# EAGLE board Qwiic-Mux-Panel (EAGLE 7.7.0), part 1 of 2
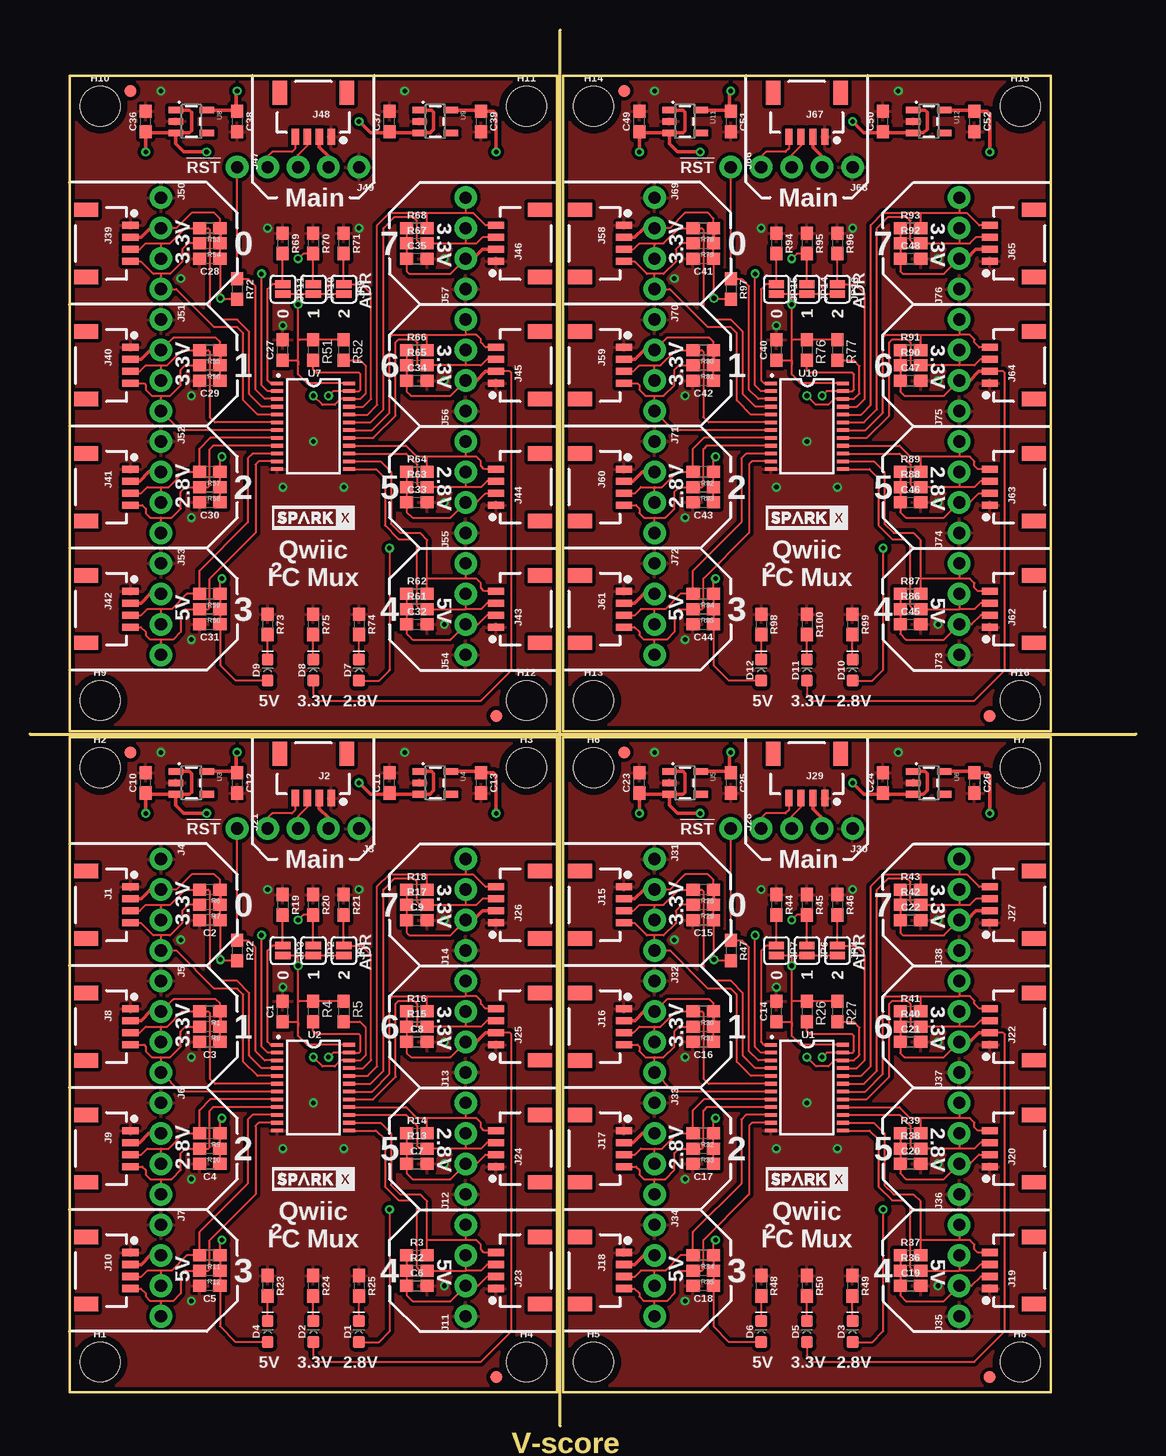
[diagram p0: board, top side]
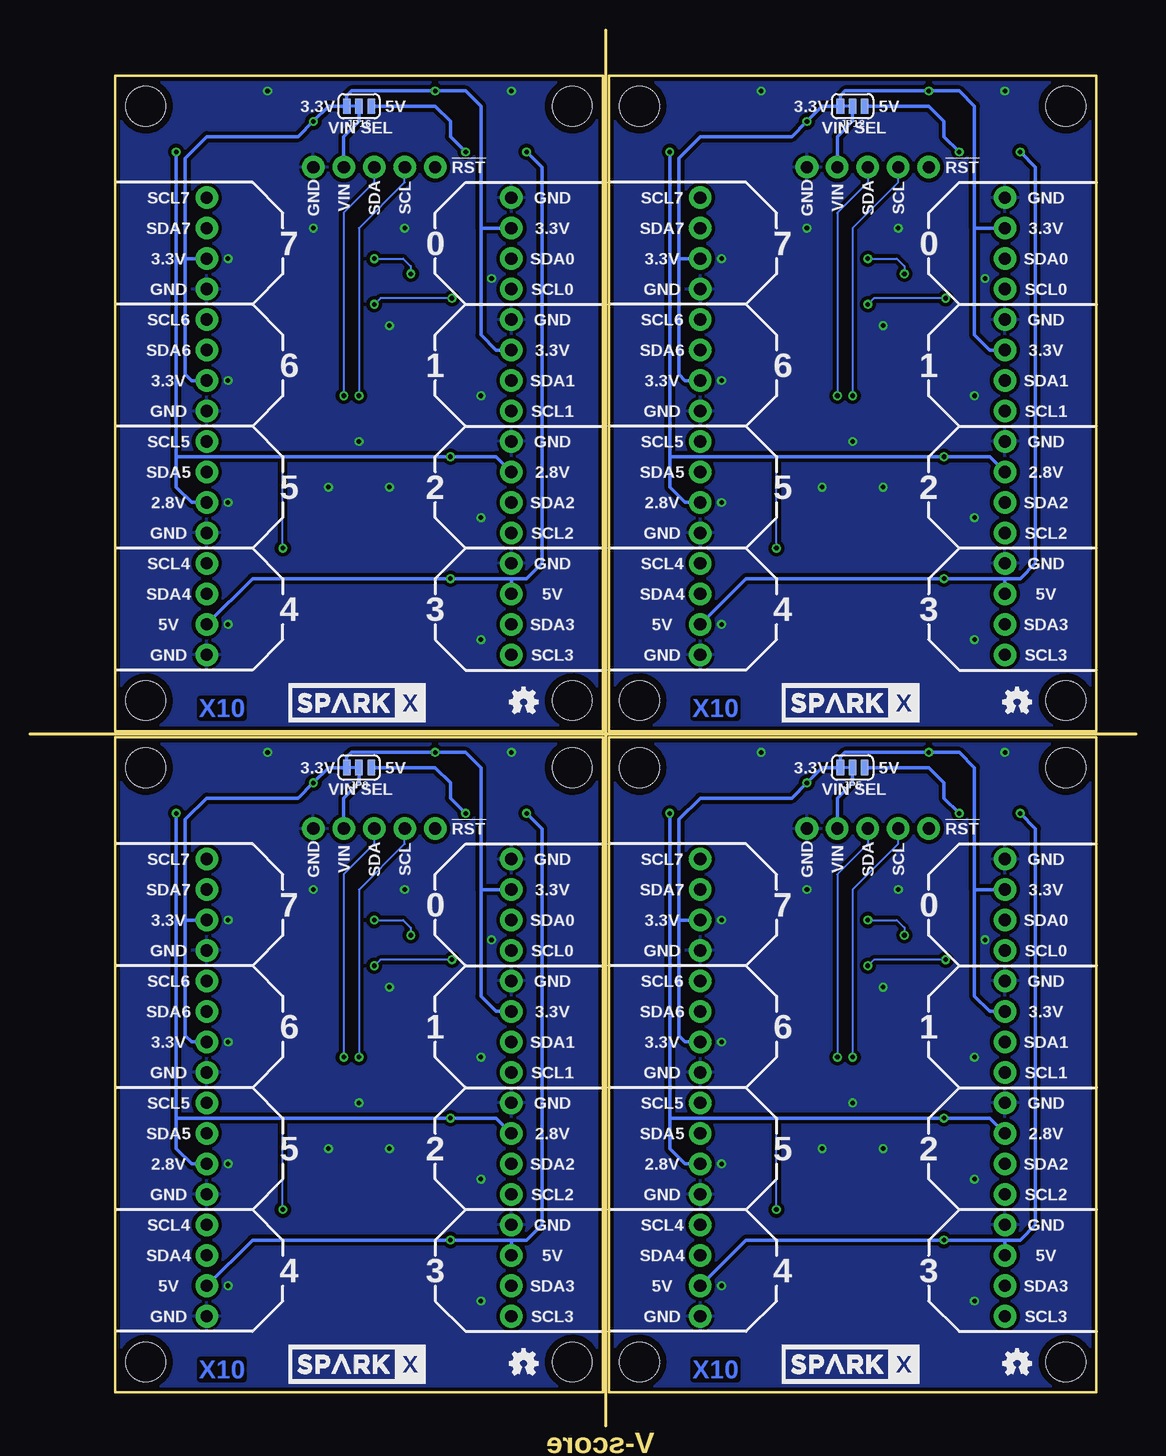
[diagram p1: board, bottom side, seen from below]

Size 92.2 x 116.33 mm. Coordinates in mm from the lower left corner, seen from the top.
Outline: 44.2,0 44.2,116.33
Outline: 0,57.66 92.2,57.66
Outline: 3.3,57.4 3.3,2.79 43.94,2.79 43.94,57.4 3.3,57.4
Outline: 44.45,57.4 44.45,2.79 85.09,2.79 85.09,57.4 44.45,57.4
Outline: 3.3,112.52 3.3,57.91 43.94,57.91 43.94,112.52 3.3,112.52
Outline: 44.45,112.52 44.45,57.91 85.09,57.91 85.09,112.52 44.45,112.52
Copper layers (1*16): Top 0.035mm / dielectric 1.5mm / Bottom 0.035mm
Design rules "SparkFun-2-layer-TIGHT": minimum track width 7mil, minimum drill 15mil, track to track 7mil, track to pad 7mil, pad to pad 7mil, via to via 7mil, smd to smd 7mil, copper to edge 7mil, drill to drill 7mil, minimum pad ring 7mil, minimum via ring 7mil, stop-mask expansion 4mil, vias tented up to drill 25mil, thermal gap 10mil
Net classes: 0 Default: width 0.178 mm; 1 vcc: width 0.178 mm

## Footprints (pad centres in the part's own frame; a part is rotated, then mirrored left to right if it is on the bottom)
0603 = smd 1.1 x 1: 1 -0.85,0; 2 0.85,0
LED-0603 = smd 1 x 1: A -0.877,0; C 0.877,0
FIDUCIAL-1X2 = smd 1 x 1: 1 0,0
STAND-OFF = hole 3.302: 0,0
1X04_1MM_RA = smd 0.6 x 1.35: 1 -1.5,0; 2 -0.5,0; 3 0.5,0; 4 1.5,0 | smd 1.2 x 2: NC1 2.8,-3.675; NC2 -2.8,-3.675
1X04_NO_SILK = drill 1.016 pad 1.88: 1 0,0; 2 2.54,0; 3 5.08,0; 4 7.62,0
1X01_NO_SILK = drill 1.016 pad 1.88: 1 0,0
SMT-JUMPER_2_NO_SILK = smd 0.635 x 1.27: 1 -0.406,0; 2 0.406,0
SMT-JUMPER_3_1-NC_TRACE_SILK = smd 0.635 x 1.27: 1 -1.016,0; 2 0,0; 3 1.016,0
TSSOP28 = smd 1 x 0.3: 1 -3,3.57; 2 -3,2.925; 3 -3,2.275; 4 -3,1.625; 5 -3,0.975; 6 -3,0.325; 7 -3,-0.325; 8 -3,-0.975; 9 -3,-1.625; 10 -3,-2.275; 11 -3,-2.925; 12 -3,-3.575; 13 3,-3.575; 14 3,-2.925; 15 3,-2.275; 16 3,-1.625; 17 3,-0.975; 18 3,-0.325; 19 3,0.325; 20 3,0.975; 21 3,1.625; 22 3,2.275; 23 3,2.925; 24 3,3.575
SOT23-5 = smd 0.55 x 1.2: 1 -0.95,-1.3; 2 0,-1.3; 3 0.95,-1.3; 4 0.95,1.3; 5 -0.95,1.3

## Placement (x,y rotation side)
C1  0.1uF  [0603]  21.08,34.54 90 top
C2  1.0uF  [0603]  14.99,42.16 180 top
C3  1.0uF  [0603]  14.99,32 180 top
C4  1.0uF  [0603]  14.99,21.84 180 top
C5  1.0uF  [0603]  14.99,11.68 180 top
C6  1.0uF  [0603]  32.26,11.68 0 top
C7  1.0uF  [0603]  32.26,21.84 0 top
C8  1.0uF  [0603]  32.26,32 0 top
C9  1.0uF  [0603]  32.26,42.16 0 top
C10  10uF  [0603]  9.65,53.59 90 top
C11  10uF  [0603]  29.97,53.59 90 top
C12  1.0uF  [0603]  17.27,53.59 270 top
C13  10uF  [0603]  37.59,53.59 270 top
C14  0.1uF  [0603]  62.23,34.54 90 top
C15  1.0uF  [0603]  56.13,42.16 180 top
C16  1.0uF  [0603]  56.13,32 180 top
C17  1.0uF  [0603]  56.13,21.84 180 top
C18  1.0uF  [0603]  56.13,11.68 180 top
C19  1.0uF  [0603]  73.41,11.68 0 top
C20  1.0uF  [0603]  73.41,21.84 0 top
C21  1.0uF  [0603]  73.41,32 0 top
C22  1.0uF  [0603]  73.41,42.16 0 top
C23  10uF  [0603]  50.8,53.59 90 top
C24  10uF  [0603]  71.12,53.59 90 top
C25  1.0uF  [0603]  58.42,53.59 270 top
C26  10uF  [0603]  78.74,53.59 270 top
C27  0.1uF  [0603]  21.08,89.66 90 top
C28  1.0uF  [0603]  14.99,97.28 180 top
C29  1.0uF  [0603]  14.99,87.12 180 top
C30  1.0uF  [0603]  14.99,76.96 180 top
C31  1.0uF  [0603]  14.99,66.8 180 top
C32  1.0uF  [0603]  32.26,66.8 0 top
C33  1.0uF  [0603]  32.26,76.96 0 top
C34  1.0uF  [0603]  32.26,87.12 0 top
C35  1.0uF  [0603]  32.26,97.28 0 top
C36  10uF  [0603]  9.65,108.71 90 top
C37  10uF  [0603]  29.97,108.71 90 top
C38  1.0uF  [0603]  17.27,108.71 270 top
C39  10uF  [0603]  37.59,108.71 270 top
C40  0.1uF  [0603]  62.23,89.66 90 top
C41  1.0uF  [0603]  56.13,97.28 180 top
C42  1.0uF  [0603]  56.13,87.12 180 top
C43  1.0uF  [0603]  56.13,76.96 180 top
C44  1.0uF  [0603]  56.13,66.8 180 top
C45  1.0uF  [0603]  73.41,66.8 0 top
C46  1.0uF  [0603]  73.41,76.96 0 top
C47  1.0uF  [0603]  73.41,87.12 0 top
C48  1.0uF  [0603]  73.41,97.28 0 top
C49  10uF  [0603]  50.8,108.71 90 top
C50  10uF  [0603]  71.12,108.71 90 top
C51  1.0uF  [0603]  58.42,108.71 270 top
C52  10uF  [0603]  78.74,108.71 270 top
D1  GREEN  [LED-0603]  27.43,7.87 90 top
D2  Yellow  [LED-0603]  23.62,7.87 90 top
D3  GREEN  [LED-0603]  68.58,7.87 90 top
D4  BLUE  [LED-0603]  19.81,7.87 90 top
D5  Yellow  [LED-0603]  64.77,7.87 90 top
D6  BLUE  [LED-0603]  60.96,7.87 90 top
D7  GREEN  [LED-0603]  27.43,62.99 90 top
D8  Yellow  [LED-0603]  23.62,62.99 90 top
D9  BLUE  [LED-0603]  19.81,62.99 90 top
D10  GREEN  [LED-0603]  68.58,62.99 90 top
D11  Yellow  [LED-0603]  64.77,62.99 90 top
D12  BLUE  [LED-0603]  60.96,62.99 90 top
FD1  FIDUCIAL1X2  [FIDUCIAL-1X2]  8.38,56.13 180 top
FD2  FIDUCIAL1X2  [FIDUCIAL-1X2]  38.86,4.06 180 top
FD3  FIDUCIAL1X2  [FIDUCIAL-1X2]  49.53,56.13 180 top
FD4  FIDUCIAL1X2  [FIDUCIAL-1X2]  80.01,4.06 180 top
FD5  FIDUCIAL1X2  [FIDUCIAL-1X2]  8.38,111.25 180 top
FD6  FIDUCIAL1X2  [FIDUCIAL-1X2]  38.86,59.18 180 top
FD7  FIDUCIAL1X2  [FIDUCIAL-1X2]  49.53,111.25 180 top
FD8  FIDUCIAL1X2  [FIDUCIAL-1X2]  80.01,59.18 180 top
H1  STAND-OFF  [STAND-OFF]  5.84,5.33 0 top
H2  STAND-OFF  [STAND-OFF]  5.84,54.86 0 top
H3  STAND-OFF  [STAND-OFF]  41.4,54.86 0 top
H4  STAND-OFF  [STAND-OFF]  41.4,5.33 0 top
H5  STAND-OFF  [STAND-OFF]  46.99,5.33 0 top
H6  STAND-OFF  [STAND-OFF]  46.99,54.86 0 top
H7  STAND-OFF  [STAND-OFF]  82.55,54.86 0 top
H8  STAND-OFF  [STAND-OFF]  82.55,5.33 0 top
H9  STAND-OFF  [STAND-OFF]  5.84,60.45 0 top
H10  STAND-OFF  [STAND-OFF]  5.84,109.98 0 top
H11  STAND-OFF  [STAND-OFF]  41.4,109.98 0 top
H12  STAND-OFF  [STAND-OFF]  41.4,60.45 0 top
H13  STAND-OFF  [STAND-OFF]  46.99,60.45 0 top
H14  STAND-OFF  [STAND-OFF]  46.99,109.98 0 top
H15  STAND-OFF  [STAND-OFF]  82.55,109.98 0 top
H16  STAND-OFF  [STAND-OFF]  82.55,60.45 0 top
J1  SMD  [1X04_1MM_RA]  8.38,43.43 270 top
J2  SMD  [1X04_1MM_RA]  23.62,52.32 180 top
J3  PTH  [1X04_NO_SILK]  27.43,49.78 180 top
J4  PTH  [1X04_NO_SILK]  10.92,47.24 270 top
J5  PTH  [1X04_NO_SILK]  10.92,37.08 270 top
J6  PTH  [1X04_NO_SILK]  10.92,26.92 270 top
J7  PTH  [1X04_NO_SILK]  10.92,16.76 270 top
J8  SMD  [1X04_1MM_RA]  8.38,33.27 270 top
J9  SMD  [1X04_1MM_RA]  8.38,23.11 270 top
J10  SMD  [1X04_1MM_RA]  8.38,12.95 270 top
J11  PTH  [1X04_NO_SILK]  36.32,9.14 90 top
J12  PTH  [1X04_NO_SILK]  36.32,19.3 90 top
J13  PTH  [1X04_NO_SILK]  36.32,29.46 90 top
J14  PTH  [1X04_NO_SILK]  36.32,39.62 90 top
J15  SMD  [1X04_1MM_RA]  49.53,43.43 270 top
J16  SMD  [1X04_1MM_RA]  49.53,33.27 270 top
J17  SMD  [1X04_1MM_RA]  49.53,23.11 270 top
J18  SMD  [1X04_1MM_RA]  49.53,12.95 270 top
J19  SMD  [1X04_1MM_RA]  80.01,12.95 90 top
J20  SMD  [1X04_1MM_RA]  80.01,23.11 90 top
J21  [1X01_NO_SILK]  17.27,49.78 270 top
J22  SMD  [1X04_1MM_RA]  80.01,33.27 90 top
J23  SMD  [1X04_1MM_RA]  38.86,12.95 90 top
J24  SMD  [1X04_1MM_RA]  38.86,23.11 90 top
J25  SMD  [1X04_1MM_RA]  38.86,33.27 90 top
J26  SMD  [1X04_1MM_RA]  38.86,43.43 90 top
J27  SMD  [1X04_1MM_RA]  80.01,43.43 90 top
J28  [1X01_NO_SILK]  58.42,49.78 270 top
J29  SMD  [1X04_1MM_RA]  64.77,52.32 180 top
J30  PTH  [1X04_NO_SILK]  68.58,49.78 180 top
J31  PTH  [1X04_NO_SILK]  52.07,47.24 270 top
J32  PTH  [1X04_NO_SILK]  52.07,37.08 270 top
J33  PTH  [1X04_NO_SILK]  52.07,26.92 270 top
J34  PTH  [1X04_NO_SILK]  52.07,16.76 270 top
J35  PTH  [1X04_NO_SILK]  77.47,9.14 90 top
J36  PTH  [1X04_NO_SILK]  77.47,19.3 90 top
J37  PTH  [1X04_NO_SILK]  77.47,29.46 90 top
J38  PTH  [1X04_NO_SILK]  77.47,39.62 90 top
J39  SMD  [1X04_1MM_RA]  8.38,98.55 270 top
J40  SMD  [1X04_1MM_RA]  8.38,88.39 270 top
J41  SMD  [1X04_1MM_RA]  8.38,78.23 270 top
J42  SMD  [1X04_1MM_RA]  8.38,68.07 270 top
J43  SMD  [1X04_1MM_RA]  38.86,68.07 90 top
J44  SMD  [1X04_1MM_RA]  38.86,78.23 90 top
J45  SMD  [1X04_1MM_RA]  38.86,88.39 90 top
J46  SMD  [1X04_1MM_RA]  38.86,98.55 90 top
J47  [1X01_NO_SILK]  17.27,104.9 270 top
J48  SMD  [1X04_1MM_RA]  23.62,107.44 180 top
J49  PTH  [1X04_NO_SILK]  27.43,104.9 180 top
J50  PTH  [1X04_NO_SILK]  10.92,102.36 270 top
J51  PTH  [1X04_NO_SILK]  10.92,92.2 270 top
J52  PTH  [1X04_NO_SILK]  10.92,82.04 270 top
J53  PTH  [1X04_NO_SILK]  10.92,71.88 270 top
J54  PTH  [1X04_NO_SILK]  36.32,64.26 90 top
J55  PTH  [1X04_NO_SILK]  36.32,74.42 90 top
J56  PTH  [1X04_NO_SILK]  36.32,84.58 90 top
J57  PTH  [1X04_NO_SILK]  36.32,94.74 90 top
J58  SMD  [1X04_1MM_RA]  49.53,98.55 270 top
J59  SMD  [1X04_1MM_RA]  49.53,88.39 270 top
J60  SMD  [1X04_1MM_RA]  49.53,78.23 270 top
J61  SMD  [1X04_1MM_RA]  49.53,68.07 270 top
J62  SMD  [1X04_1MM_RA]  80.01,68.07 90 top
J63  SMD  [1X04_1MM_RA]  80.01,78.23 90 top
J64  SMD  [1X04_1MM_RA]  80.01,88.39 90 top
J65  SMD  [1X04_1MM_RA]  80.01,98.55 90 top
J66  [1X01_NO_SILK]  58.42,104.9 270 top
J67  SMD  [1X04_1MM_RA]  64.77,107.44 180 top
J68  PTH  [1X04_NO_SILK]  68.58,104.9 180 top
J69  PTH  [1X04_NO_SILK]  52.07,102.36 270 top
J70  PTH  [1X04_NO_SILK]  52.07,92.2 270 top
J71  PTH  [1X04_NO_SILK]  52.07,82.04 270 top
J72  PTH  [1X04_NO_SILK]  52.07,71.88 270 top
J73  PTH  [1X04_NO_SILK]  77.47,64.26 90 top
J74  PTH  [1X04_NO_SILK]  77.47,74.42 90 top
J75  PTH  [1X04_NO_SILK]  77.47,84.58 90 top
J76  PTH  [1X04_NO_SILK]  77.47,94.74 90 top
JP1  [SMT-JUMPER_2_NO_SILK]  26.16,39.62 270 top
JP2  [SMT-JUMPER_2_NO_SILK]  23.62,39.62 270 top
JP3  [SMT-JUMPER_2_NO_SILK]  21.08,39.62 270 top
JP4  [SMT-JUMPER_2_NO_SILK]  67.31,39.62 270 top
JP5  [SMT-JUMPER_3_1-NC_TRACE_SILK]  23.62,54.86 180 bottom
JP6  [SMT-JUMPER_2_NO_SILK]  64.77,39.62 270 top
JP7  [SMT-JUMPER_2_NO_SILK]  62.23,39.62 270 top
JP8  [SMT-JUMPER_3_1-NC_TRACE_SILK]  64.77,54.86 180 bottom
JP9  [SMT-JUMPER_2_NO_SILK]  26.16,94.74 270 top
JP10  [SMT-JUMPER_2_NO_SILK]  23.62,94.74 270 top
JP11  [SMT-JUMPER_2_NO_SILK]  21.08,94.74 270 top
JP12  [SMT-JUMPER_3_1-NC_TRACE_SILK]  23.62,109.98 180 bottom
JP13  [SMT-JUMPER_2_NO_SILK]  67.31,94.74 270 top
JP14  [SMT-JUMPER_2_NO_SILK]  64.77,94.74 270 top
JP15  [SMT-JUMPER_2_NO_SILK]  62.23,94.74 270 top
JP16  [SMT-JUMPER_3_1-NC_TRACE_SILK]  64.77,109.98 180 bottom
LOGO1  OSHW-LOGOMINI  [OSHW-LOGO-MINI]  9.9,5.22 0 bottom
LOGO2  OSHW-LOGOMINI  [OSHW-LOGO-MINI]  51.05,5.22 0 bottom
LOGO3  OSHW-LOGOMINI  [OSHW-LOGO-MINI]  9.9,60.34 0 bottom
LOGO4  OSHW-LOGOMINI  [OSHW-LOGO-MINI]  51.05,60.34 0 bottom
R1  4.7k  [0603]  14.99,34.54 180 top
R2  4.7k  [0603]  32.26,12.95 0 top
R3  4.7k  [0603]  32.26,14.22 0 top
R4  4.7k  [0603]  23.62,34.54 270 top
R5  4.7k  [0603]  26.16,34.54 270 top
R6  4.7k  [0603]  14.99,44.7 180 top
R7  4.7k  [0603]  14.99,43.43 180 top
R8  4.7k  [0603]  14.99,33.27 180 top
R9  4.7k  [0603]  14.99,24.38 180 top
R10  4.7k  [0603]  14.99,23.11 180 top
R11  4.7k  [0603]  14.99,14.22 180 top
R12  4.7k  [0603]  14.99,12.95 180 top
R13  4.7k  [0603]  32.26,23.11 0 top
R14  4.7k  [0603]  32.26,24.38 0 top
R15  4.7k  [0603]  32.26,33.27 0 top
R16  4.7k  [0603]  32.26,34.54 0 top
R17  4.7k  [0603]  32.26,43.43 0 top
R18  4.7k  [0603]  32.26,44.7 0 top
R19  10k  [0603]  21.08,43.43 270 top
R20  10k  [0603]  23.62,43.43 270 top
R21  10k  [0603]  26.16,43.43 270 top
R22  10k  [0603]  17.27,39.62 270 top
R23  330  [0603]  19.81,11.68 270 top
R24  330  [0603]  23.62,11.68 270 top
R25  330  [0603]  27.43,11.68 270 top
R26  4.7k  [0603]  64.77,34.54 270 top
R27  4.7k  [0603]  67.31,34.54 270 top
R28  4.7k  [0603]  56.13,44.7 180 top
R29  4.7k  [0603]  56.13,43.43 180 top
R30  4.7k  [0603]  56.13,34.54 180 top
R31  4.7k  [0603]  56.13,33.27 180 top
R32  4.7k  [0603]  56.13,24.38 180 top
R33  4.7k  [0603]  56.13,23.11 180 top
R34  4.7k  [0603]  56.13,14.22 180 top
R35  4.7k  [0603]  56.13,12.95 180 top
R36  4.7k  [0603]  73.41,12.95 0 top
R37  4.7k  [0603]  73.41,14.22 0 top
R38  4.7k  [0603]  73.41,23.11 0 top
R39  4.7k  [0603]  73.41,24.38 0 top
R40  4.7k  [0603]  73.41,33.27 0 top
R41  4.7k  [0603]  73.41,34.54 0 top
R42  4.7k  [0603]  73.41,43.43 0 top
R43  4.7k  [0603]  73.41,44.7 0 top
R44  10k  [0603]  62.23,43.43 270 top
R45  10k  [0603]  64.77,43.43 270 top
R46  10k  [0603]  67.31,43.43 270 top
R47  10k  [0603]  58.42,39.62 270 top
R48  330  [0603]  60.96,11.68 270 top
R49  330  [0603]  68.58,11.68 270 top
R50  330  [0603]  64.77,11.68 270 top
R51  4.7k  [0603]  23.62,89.66 270 top
R52  4.7k  [0603]  26.16,89.66 270 top
R53  4.7k  [0603]  14.99,99.82 180 top
R54  4.7k  [0603]  14.99,98.55 180 top
R55  4.7k  [0603]  14.99,89.66 180 top
R56  4.7k  [0603]  14.99,88.39 180 top
R57  4.7k  [0603]  14.99,79.5 180 top
R58  4.7k  [0603]  14.99,78.23 180 top
R59  4.7k  [0603]  14.99,69.34 180 top
R60  4.7k  [0603]  14.99,68.07 180 top
R61  4.7k  [0603]  32.26,68.07 0 top
R62  4.7k  [0603]  32.26,69.34 0 top
R63  4.7k  [0603]  32.26,78.23 0 top
R64  4.7k  [0603]  32.26,79.5 0 top
R65  4.7k  [0603]  32.26,88.39 0 top
R66  4.7k  [0603]  32.26,89.66 0 top
R67  4.7k  [0603]  32.26,98.55 0 top
R68  4.7k  [0603]  32.26,99.82 0 top
R69  10k  [0603]  21.08,98.55 270 top
R70  10k  [0603]  23.62,98.55 270 top
R71  10k  [0603]  26.16,98.55 270 top
R72  10k  [0603]  17.27,94.74 270 top
R73  330  [0603]  19.81,66.8 270 top
R74  330  [0603]  27.43,66.8 270 top
R75  330  [0603]  23.62,66.8 270 top
R76  4.7k  [0603]  64.77,89.66 270 top
R77  4.7k  [0603]  67.31,89.66 270 top
R78  4.7k  [0603]  56.13,99.82 180 top
R79  4.7k  [0603]  56.13,98.55 180 top
R80  4.7k  [0603]  56.13,89.66 180 top
R81  4.7k  [0603]  56.13,88.39 180 top
R82  4.7k  [0603]  56.13,79.5 180 top
R83  4.7k  [0603]  56.13,78.23 180 top
R84  4.7k  [0603]  56.13,69.34 180 top
R85  4.7k  [0603]  56.13,68.07 180 top
R86  4.7k  [0603]  73.41,68.07 0 top
R87  4.7k  [0603]  73.41,69.34 0 top
R88  4.7k  [0603]  73.41,78.23 0 top
R89  4.7k  [0603]  73.41,79.5 0 top
R90  4.7k  [0603]  73.41,88.39 0 top
R91  4.7k  [0603]  73.41,89.66 0 top
R92  4.7k  [0603]  73.41,98.55 0 top
R93  4.7k  [0603]  73.41,99.82 0 top
R94  10k  [0603]  62.23,98.55 270 top
R95  10k  [0603]  64.77,98.55 270 top
R96  10k  [0603]  67.31,98.55 270 top
R97  10k  [0603]  58.42,94.74 270 top
R98  330  [0603]  60.96,66.8 270 top
R99  330  [0603]  68.58,66.8 270 top
R100  330  [0603]  64.77,66.8 270 top
U1  TCA9548A  [TSSOP28]  64.77,28.19 0 top
U2  TCA9548A  [TSSOP28]  23.62,28.19 0 top
U3  3.3V/150mA  [SOT23-5]  13.46,53.59 270 top
U4  2.8V/150mA  [SOT23-5]  33.78,53.59 270 top
U5  3.3V/150mA  [SOT23-5]  54.61,53.59 270 top
U6  2.8V/150mA  [SOT23-5]  74.93,53.59 270 top
U7  TCA9548A  [TSSOP28]  23.62,83.31 0 top
U8  3.3V/150mA  [SOT23-5]  13.46,108.71 270 top
U9  2.8V/150mA  [SOT23-5]  33.78,108.71 270 top
U10  TCA9548A  [TSSOP28]  64.77,83.31 0 top
U11  3.3V/150mA  [SOT23-5]  54.61,108.71 270 top
U12  2.8V/150mA  [SOT23-5]  74.93,108.71 270 top
U$1  SPARKX-LOGO3  [SPARKX-SMALL]  23.62,20.57 0 top
U$2  SPARKX-LOGO5  [SPARKX-LARGE]  23.79,5.14 0 bottom
U$3  SPARKX-LOGO3  [SPARKX-SMALL]  64.77,20.57 0 top
U$4  SPARKX-LOGO5  [SPARKX-LARGE]  64.94,5.14 0 bottom
U$5  SPARKX-LOGO3  [SPARKX-SMALL]  23.62,75.69 0 top
U$6  SPARKX-LOGO5  [SPARKX-LARGE]  23.79,60.26 0 bottom
U$7  SPARKX-LOGO3  [SPARKX-SMALL]  64.77,75.69 0 top
U$8  SPARKX-LOGO5  [SPARKX-LARGE]  64.94,60.26 0 bottom

## Library data of the parts
C1 C14 C27 C40 = SparkFun-Capacitors; PROD_ID: CAP-00810
C2-C9 C12 C15-C22 C25 C28-C35 C38 C41-C48 C51 = SparkFun-Capacitors; PROD_ID: CAP-00868
C10 C11 C13 C23 C24 C26 C36 C37 C39 C49 C50 C52 = SparkFun-Capacitors; PROD_ID: CAP-11015
D1 D3 D7 D10 = SparkFun-LED; PROD_ID: DIO-00821
D2 D5 D8 D11 = SparkFun-LED; PROD_ID: DIO-09003
D4 D6 D9 D12 = SparkFun-LED; PROD_ID: DIO-08575
FD1-FD8 LOGO1-LOGO4 = SparkFun-Aesthetics
H1-H16 = SparkFun-Hardware
J1-J20 J22-J27 J29-J46 J48-J65 J67-J76 U1 U2 U7 U10 U$1-U$8 = SparkX
J21 J28 J47 J66 = SparkFun-Connectors
JP1-JP16 = SparkFun-Jumpers
R1-R18 R26-R43 R51-R68 R76-R93 = SparkFun-Resistors; PROD_ID: RES-07857
R19-R22 R44-R47 R69-R72 R94-R97 = SparkFun-Resistors; PROD_ID: RES-00824
R23-R25 R48-R50 R73-R75 R98-R100 = SparkFun-Resistors; PROD_ID: RES-00818
U3-U6 U8 U9 U11 U12 = SparkFun-IC-Power; PROD_ID: VREG-00822

## Nets
2.8V: C4.1 C7.1 C13.1 D1.A J6.2 J9.2 J12.2 J24.2 R9.1 R10.1 R13.1 R14.1 U4.5
2.8V1: C17.1 C20.1 C26.1 D3.A J17.2 J20.2 J33.2 J36.2 R32.1 R33.1 R38.1 R39.1 U6.5
2.8V2: C30.1 C33.1 C39.1 D7.A J41.2 J44.2 J52.2 J55.2 R57.1 R58.1 R63.1 R64.1 U9.5
2.8V3: C43.1 C46.1 C52.1 D10.A J60.2 J63.2 J71.2 J74.2 R82.1 R83.1 R88.1 R89.1 U12.5
3.3V: C1.1 C2.1 C3.1 C8.1 C9.1 C11.1 C12.1 D2.A J1.2 J4.2 J5.2 J8.2 J13.2 J14.2 J25.2 J26.2 JP1.2 JP2.2 JP3.2 JP5.3 R1.1 R4.1 R5.1 R6.1 R7.1 R8.1 R15.1 R16.1 R17.1 R18.1 R22.2 U2.24 U3.5 U4.1 U4.3
3.3V1: C14.1 C15.1 C16.1 C21.1 C22.1 C24.1 C25.1 D5.A J15.2 J16.2 J22.2 J27.2 J31.2 J32.2 J37.2 J38.2 JP4.2 JP6.2 JP7.2 JP8.3 R26.1 R27.1 R28.1 R29.1 R30.1 R31.1 R40.1 R41.1 R42.1 R43.1 R47.2 U1.24 U5.5 U6.1 U6.3
3.3V2: C27.1 C28.1 C29.1 C34.1 C35.1 C37.1 C38.1 D8.A J39.2 J40.2 J45.2 J46.2 J50.2 J51.2 J56.2 J57.2 JP9.2 JP10.2 JP11.2 JP12.3 R51.1 R52.1 R53.1 R54.1 R55.1 R56.1 R65.1 R66.1 R67.1 R68.1 R72.2 U7.24 U8.5 U9.1 U9.3
3.3V3: C40.1 C41.1 C42.1 C47.1 C48.1 C50.1 C51.1 D11.A J58.2 J59.2 J64.2 J65.2 J69.2 J70.2 J75.2 J76.2 JP13.2 JP14.2 JP15.2 JP16.3 R76.1 R77.1 R78.1 R79.1 R80.1 R81.1 R90.1 R91.1 R92.1 R93.1 R97.2 U10.24 U11.5 U12.1 U12.3
5V: C5.1 C6.1 C10.1 D4.A J7.2 J10.2 J11.2 J23.2 JP5.1 R2.1 R3.1 R11.1 R12.1 U3.1 U3.3
5V1: C18.1 C19.1 C23.1 D6.A J18.2 J19.2 J34.2 J35.2 JP8.1 R34.1 R35.1 R36.1 R37.1 U5.1 U5.3
5V2: C31.1 C32.1 C36.1 D9.A J42.2 J43.2 J53.2 J54.2 JP12.1 R59.1 R60.1 R61.1 R62.1 U8.1 U8.3
5V3: C44.1 C45.1 C49.1 D12.A J61.2 J62.2 J72.2 J73.2 JP16.1 R84.1 R85.1 R86.1 R87.1 U11.1 U11.3
!RST: J21.1 R22.1 U2.3
!RST1: J28.1 R47.1 U1.3
!RST2: J47.1 R72.1 U7.3
!RST3: J66.1 R97.1 U10.3
ADR0: JP3.1 R19.2 U2.1
ADR1: JP2.1 R20.2 U2.2
ADR2: JP1.1 R21.2 U2.21
ADR3: JP6.1 R45.2 U1.2
ADR4: JP7.1 R44.2 U1.1
ADR5: JP4.1 R46.2 U1.21
ADR6: JP10.1 R70.2 U7.2
ADR7: JP11.1 R69.2 U7.1
ADR8: JP9.1 R71.2 U7.21
ADR9: JP14.1 R95.2 U10.2
ADR10: JP15.1 R94.2 U10.1
ADR11: JP13.1 R96.2 U10.21
GND [vcc]: C1.2 C2.2 C3.2 C4.2 C5.2 C6.2 C7.2 C8.2 C9.2 C10.2 C11.2 C12.2 C13.2 J1.1 J2.1 J3.1 J4.1 J5.1 J6.1 J7.1 J8.1 J9.1 J10.1 J11.1 J12.1 J13.1 J14.1 J23.1 J24.1 J25.1 J26.1 R19.1 R20.1 R21.1 R23.1 R24.1 R25.1 U2.12 U3.2 U4.2
GND1 [vcc]: C14.2 C15.2 C16.2 C17.2 C18.2 C19.2 C20.2 C21.2 C22.2 C23.2 C24.2 C25.2 C26.2 J15.1 J16.1 J17.1 J18.1 J19.1 J20.1 J22.1 J27.1 J29.1 J30.1 J31.1 J32.1 J33.1 J34.1 J35.1 J36.1 J37.1 J38.1 R44.1 R45.1 R46.1 R48.1 R49.1 R50.1 U1.12 U5.2 U6.2
GND2 [vcc]: C27.2 C28.2 C29.2 C30.2 C31.2 C32.2 C33.2 C34.2 C35.2 C36.2 C37.2 C38.2 C39.2 J39.1 J40.1 J41.1 J42.1 J43.1 J44.1 J45.1 J46.1 J48.1 J49.1 J50.1 J51.1 J52.1 J53.1 J54.1 J55.1 J56.1 J57.1 R69.1 R70.1 R71.1 R73.1 R74.1 R75.1 U7.12 U8.2 U9.2
GND3 [vcc]: C40.2 C41.2 C42.2 C43.2 C44.2 C45.2 C46.2 C47.2 C48.2 C49.2 C50.2 C51.2 C52.2 J58.1 J59.1 J60.1 J61.1 J62.1 J63.1 J64.1 J65.1 J67.1 J68.1 J69.1 J70.1 J71.1 J72.1 J73.1 J74.1 J75.1 J76.1 R94.1 R95.1 R96.1 R98.1 R99.1 R100.1 U10.12 U11.2 U12.2
MAIN_SCL: J2.4 J3.4 R5.2 U2.22
MAIN_SCL1: J29.4 J30.4 R27.2 U1.22
MAIN_SCL2: J48.4 J49.4 R52.2 U7.22
MAIN_SCL3: J67.4 J68.4 R77.2 U10.22
MAIN_SDA: J2.3 J3.3 R4.2 U2.23
MAIN_SDA1: J29.3 J30.3 R26.2 U1.23
MAIN_SDA2: J48.3 J49.3 R51.2 U7.23
MAIN_SDA3: J67.3 J68.3 R76.2 U10.23
N$1: D2.C R24.2
N$2: D5.C R50.2
N$3: D1.C R25.2
N$4: D4.C R23.2
N$5: D3.C R49.2
N$6: D6.C R48.2
N$7: D8.C R75.2
N$8: D7.C R74.2
N$9: D9.C R73.2
N$10: D11.C R100.2
N$11: D10.C R99.2
N$12: D12.C R98.2
SCL0: J1.4 J4.4 R7.2 U2.5
SCL1: J5.4 J8.4 R8.2 U2.7
SCL2: J6.4 J9.4 R10.2 U2.9
SCL3: J7.4 J10.4 R12.2 U2.11
SCL4: J11.4 J23.4 R3.2 U2.14
SCL5: J12.4 J24.4 R14.2 U2.16
SCL6: J13.4 J25.4 R16.2 U2.18
SCL7: J14.4 J26.4 R18.2 U2.20
SCL8: J15.4 J31.4 R29.2 U1.5
SCL9: J16.4 J32.4 R31.2 U1.7
SCL10: J18.4 J34.4 R35.2 U1.11
SCL11: J19.4 J35.4 R37.2 U1.14
SCL12: J20.4 J36.4 R39.2 U1.16
SCL13: J22.4 J37.4 R41.2 U1.18
SCL14: J27.4 J38.4 R43.2 U1.20
SCL15: J17.4 J33.4 R33.2 U1.9
SCL16: J39.4 J50.4 R54.2 U7.5
SCL17: J40.4 J51.4 R56.2 U7.7
SCL18: J42.4 J53.4 R60.2 U7.11
SCL19: J43.4 J54.4 R62.2 U7.14
SCL20: J44.4 J55.4 R64.2 U7.16
SCL21: J45.4 J56.4 R66.2 U7.18
SCL22: J46.4 J57.4 R68.2 U7.20
SCL23: J41.4 J52.4 R58.2 U7.9
SCL24: J58.4 J69.4 R79.2 U10.5
SCL25: J59.4 J70.4 R81.2 U10.7
SCL26: J61.4 J72.4 R85.2 U10.11
SCL27: J62.4 J73.4 R87.2 U10.14
SCL28: J63.4 J74.4 R89.2 U10.16
SCL29: J64.4 J75.4 R91.2 U10.18
SCL30: J65.4 J76.4 R93.2 U10.20
SCL31: J60.4 J71.4 R83.2 U10.9
SDA0: J1.3 J4.3 R6.2 U2.4
SDA1: J5.3 J8.3 R1.2 U2.6
SDA2: J6.3 J9.3 R9.2 U2.8
SDA3: J7.3 J10.3 R11.2 U2.10
SDA4: J11.3 J23.3 R2.2 U2.13
SDA5: J12.3 J24.3 R13.2 U2.15
SDA6: J13.3 J25.3 R15.2 U2.17
SDA7: J14.3 J26.3 R17.2 U2.19
SDA8: J15.3 J31.3 R28.2 U1.4
SDA9: J16.3 J32.3 R30.2 U1.6
SDA10: J18.3 J34.3 R34.2 U1.10
SDA11: J19.3 J35.3 R36.2 U1.13
SDA12: J20.3 J36.3 R38.2 U1.15
SDA13: J27.3 J38.3 R42.2 U1.19
SDA14: J22.3 J37.3 R40.2 U1.17
SDA15: J17.3 J33.3 R32.2 U1.8
SDA16: J39.3 J50.3 R53.2 U7.4
SDA17: J40.3 J51.3 R55.2 U7.6
SDA18: J42.3 J53.3 R59.2 U7.10
SDA19: J43.3 J54.3 R61.2 U7.13
SDA20: J44.3 J55.3 R63.2 U7.15
SDA21: J46.3 J57.3 R67.2 U7.19
SDA22: J45.3 J56.3 R65.2 U7.17
SDA23: J41.3 J52.3 R57.2 U7.8
SDA24: J58.3 J69.3 R78.2 U10.4
SDA25: J59.3 J70.3 R80.2 U10.6
SDA26: J61.3 J72.3 R84.2 U10.10
SDA27: J62.3 J73.3 R86.2 U10.13
SDA28: J63.3 J74.3 R88.2 U10.15
SDA29: J65.3 J76.3 R92.2 U10.19
SDA30: J64.3 J75.3 R90.2 U10.17
SDA31: J60.3 J71.3 R82.2 U10.8
VIN: J2.2 J3.2 JP5.2
VIN1: J29.2 J30.2 JP8.2
VIN2: J48.2 J49.2 JP12.2
VIN3: J67.2 J68.2 JP16.2